# Altium PCB Sync.PcbDoc
Units mm, origin at the board's own origin, x right, y up, seen from the top; angles counter-clockwise.
Board outline 53 x 53 mm, 2 copper layers (Top Layer, Bottom Layer), stack 0.891 mm thick; 23 components, 14 nets, 60 pads, 114 vias.
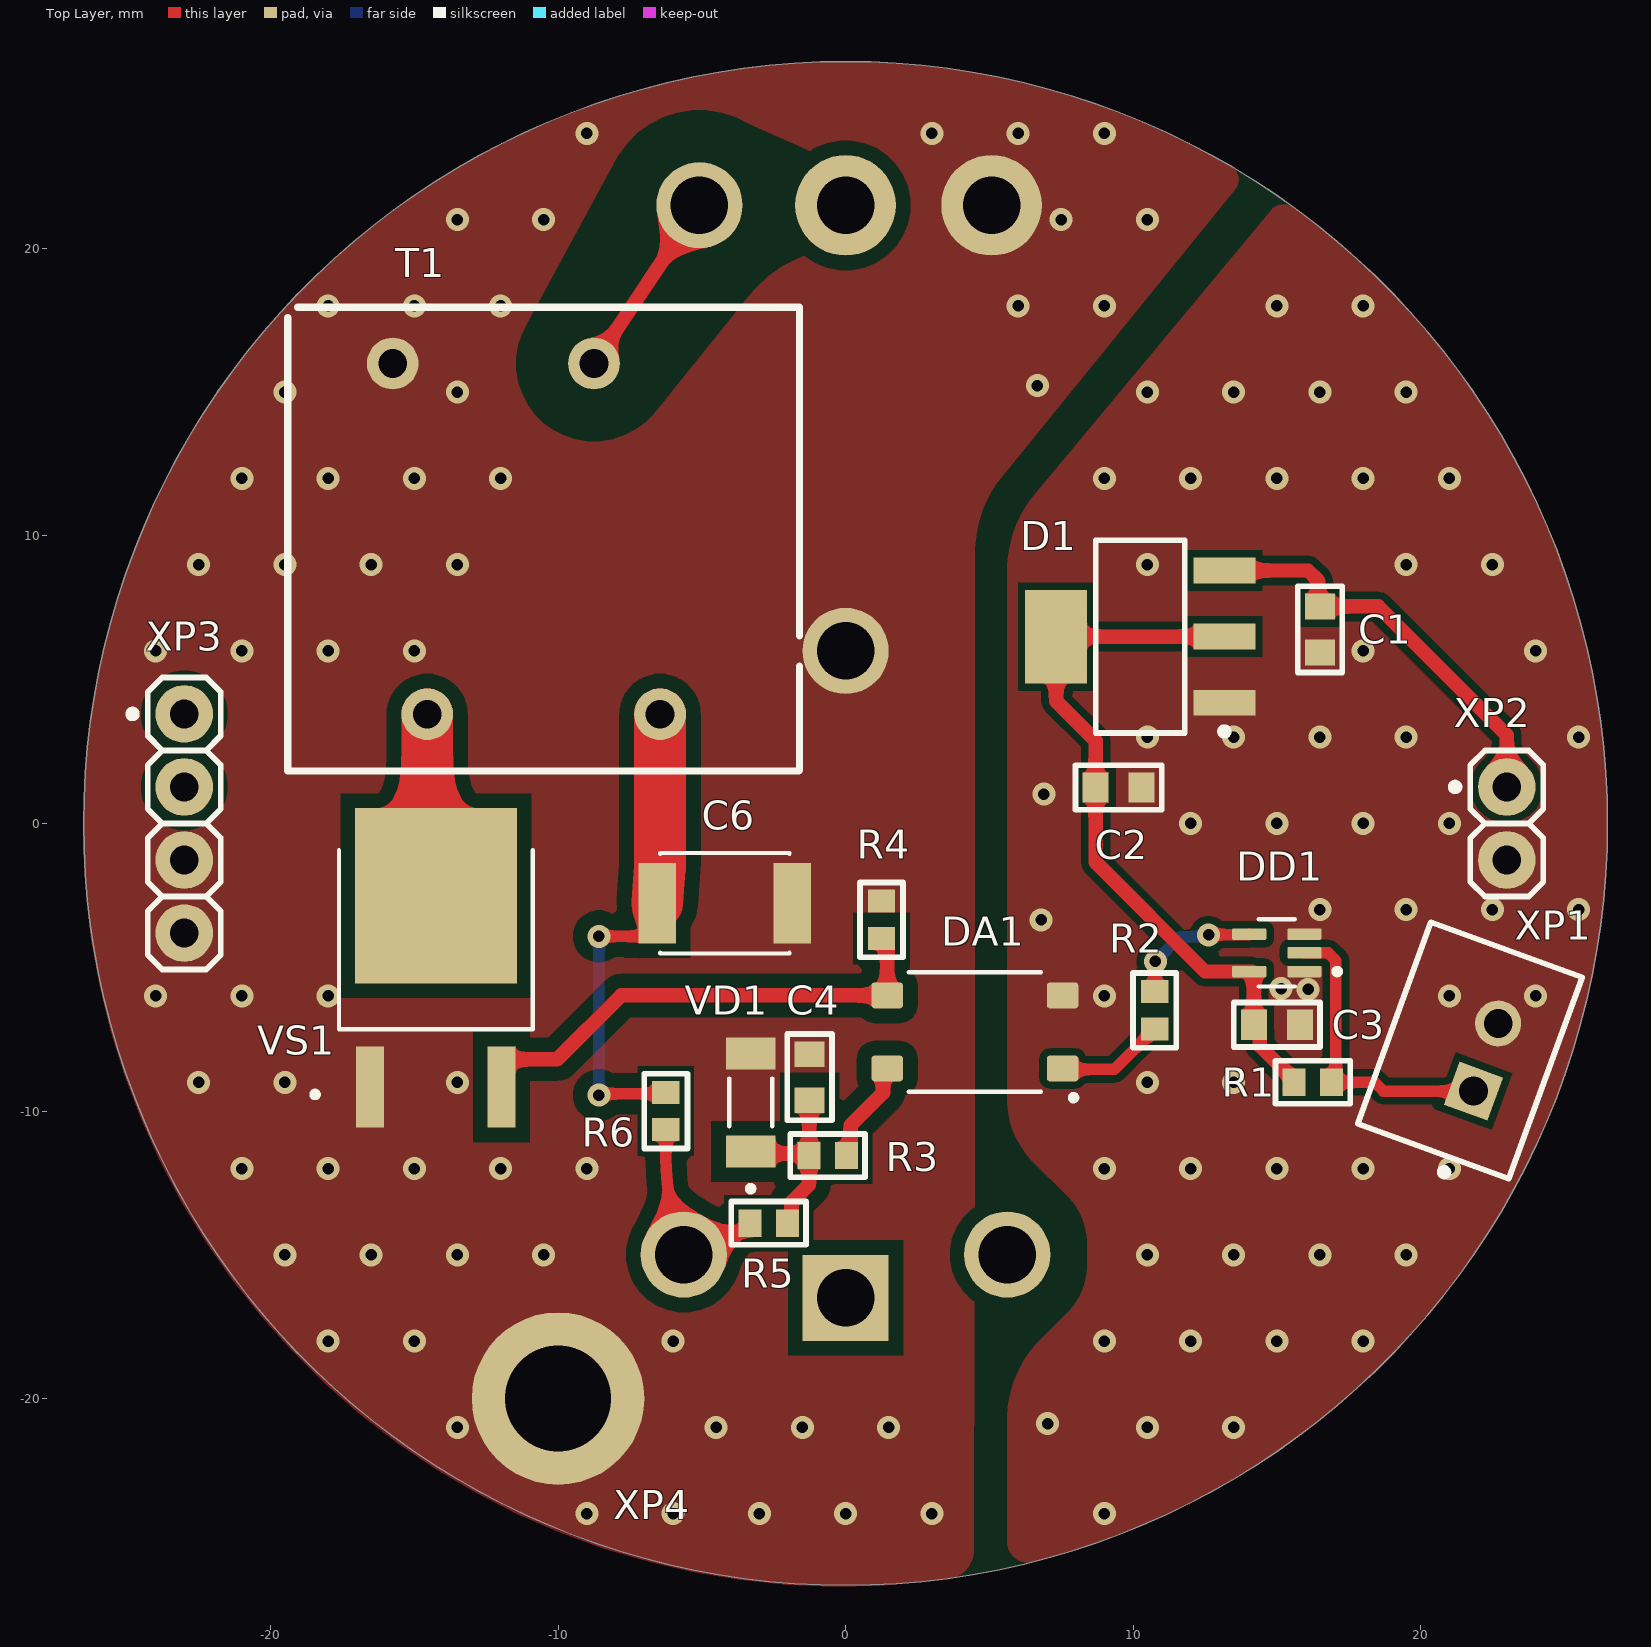
[diagram p0: Top Layer view]
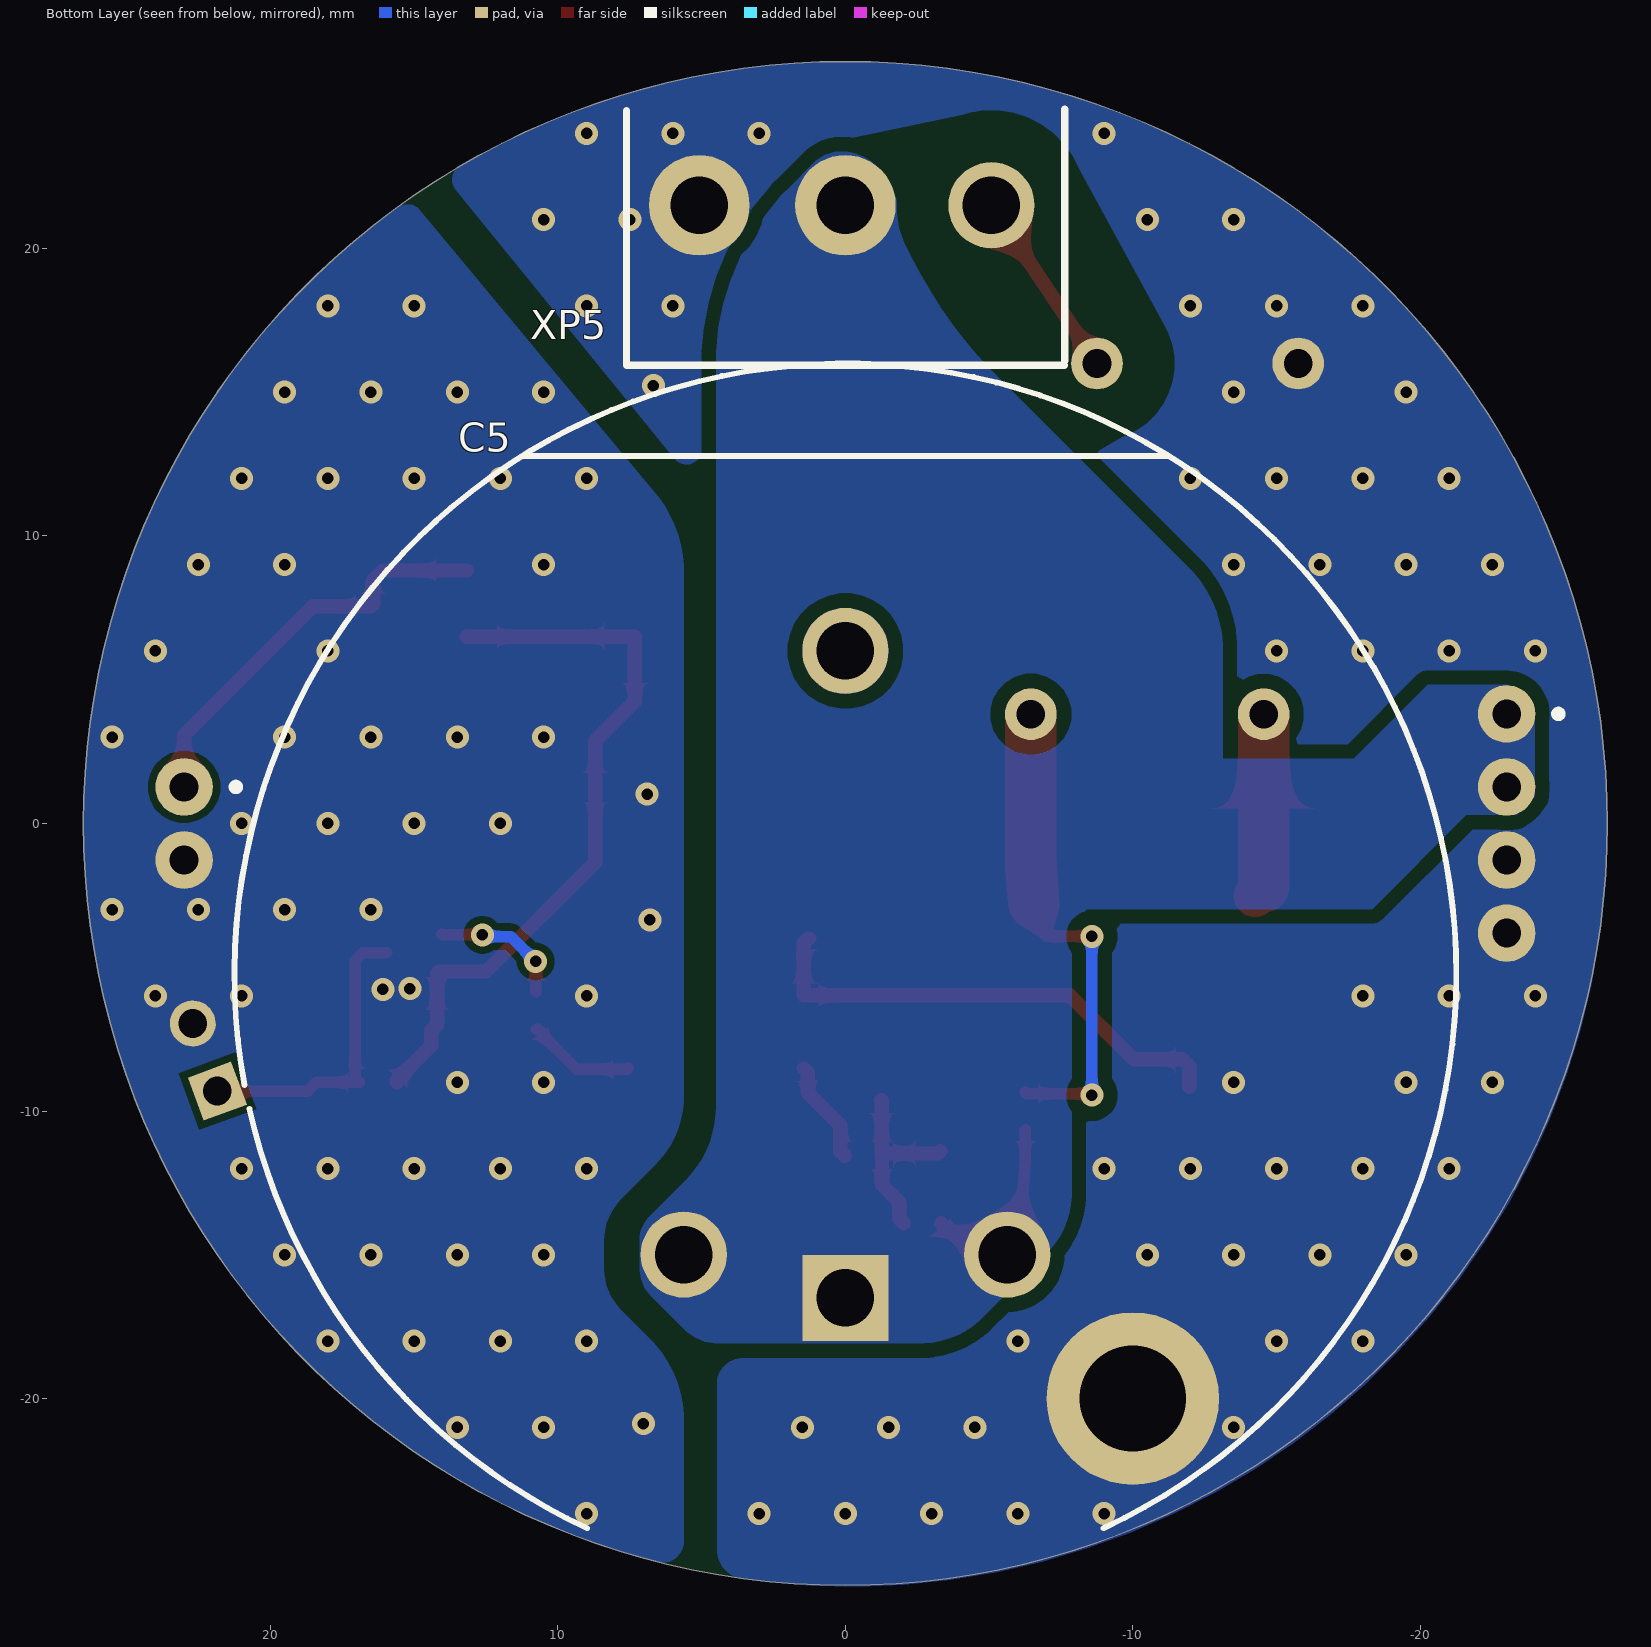
[diagram p1: Bottom Layer view, seen from below]

## Layer stack, top to bottom
Top Solder: solder mask 0.0102, Solder Resist, Dk 3.5
Top Layer: signal copper 0.0356
Dielectric 1: dielectric 0.82, FR-4, Dk 4.8
Bottom Layer: signal copper 0.0356
Bottom Solder: solder mask 0.0102, Solder Resist, Dk 3.5

## Board outline
0,-26.5 cw(c0,0) -26.5,0 cw(c0,0) 0,26.5 cw(c0,0) 26.5,0 cw(c0,0)

## Design rules (kind name [scope] priority, off if disabled: settings)
Clearance Clearance_2 [InNetClass('ebanuto_high_voltage')] p1: gap=1.8 ignorepadtopadclearanceinfootprint=FALSE
Clearance Clearance_1 [InNetClass('high_voltage')] p2: gap=0.5 ignorepadtopadclearanceinfootprint=FALSE
Clearance [All] p3: gap=0.25 ignorepadtopadclearanceinfootprint=TRUE
ComponentClearance [All] p1: gap=0 collisioncheckmode=3 verticalgap=2540 showdistances=FALSE
Height [All] p1: minheight=0 maxheight=104 prefheight=12.7
HoleSize [All] p1: absolutevalues=TRUE maxlimit=4 minlimit=0.4 maxpercent=80.000 minpercent=20.000
MinimumSolderMaskSliver [All] p1: minsoldermaskwidth=0.15
PolygonConnect [All] p1: connectstyle=Direct reliefconductorwidth=0.254 reliefentries=4 polygonreliefangle="90 Angle" airgapwidth=0.254
RoutingVias [All] p1: holewidth=0.4 width=0.8 viastyle="Through Hole" minholewidth=0.4 minwidth=0.8 maxholewidth=0.8 maxwidth=1.2
SilkToSilkClearance [All] p1: silktosilkclearance=0.05
SilkToSolderMaskClearance [IsPad] p1: minsilkscreentomaskgap=0.05 clearancetoexposedcopper=TRUE
SolderMaskExpansion SolderMaskExpansion_1 [HoleSize=0.4] p1: expansion=0.102 istentingtop=TRUE
SolderMaskExpansion [All] p2: expansion=0.102 istentingtop=FALSE
SupplyNets "Schematic Supply Nets_4" [InNet('+5')] p1: voltage=0.000
SupplyNets "Schematic Supply Nets_2" [InNet('GND')] p2: voltage=0.000
SupplyNets "Schematic Supply Nets_3" [InNet('+15')] p3: voltage=0.000
SupplyNets "Schematic Supply Nets_1" [InNet('+300')] p4: voltage=0.000
SupplyNets "Schematic Supply Nets" [InNet('GND_HV')] p5: voltage=0.000
Width [All] p1: maxlimit=1.8 minlimit=0.2 preferedwidth=0.25
24 further rules are at their usual default settings.

## Classes and differential pairs
net class high_voltage: +300 GND_HV NetC4_2 NetC6_2 NetDA1_3 NetDA1_4 NetT1_5 NetT1_8
net class ebanuto_high_voltage: NetT1_8

## Components (designator, comment, footprint, x,y, rotation, side; value= is the part's Value field where it differs from the comment)
C1 "Capacitor" 0603C 16.5,6.75 r90 top value="0,1 мк"
C2 "Capacitor" 0603C 9.5,1.25 r180 top value="0,1 мк"
C3 "Capacitor" 0603C 15,-7 r180 top value="0,1 мк"
C4 "Capacitor" 0603C -1.25,-8.825 r270 top value="1 мк"
C5 "Capacitor_polar" 42x103_radial 0,-5.25 r270 bottom value="2700 мк"
C6 "Capacitor" 1812C -4.2,-2.775 r180 top value="0,1 мк"
D1 "LD1117S50CTR" SOT223 10.25,6.5 r180 top
DA1 "LTV354T" SOP4-2_54 4.5,-7.25 r180 top
DD1 "SN74LVC1G14DCKR" SC-70-5 15,-4.5 r180 top
R1 "Resistor" 0603R 16.25,-9 r180 top value="1,0 к"
R2 "Resistor" 0603R 10.75,-6.5 r270 top value=180
R3 "Resistor" 0603R -0.625,-11.55 r180 top value="1,8 к"
R4 "Resistor" 0603R 1.25,-3.35 r270 top value=100
R5 "Resistor" 0603R -2.675,-13.9 r180 top value="39 к"
R6 "Resistor" 0603R -6.25,-10 r270 top value="510 к"
T1 "HV_trans" EE16_transformer -10.5,9.9 r180 top value=0
VD1 "BZV55-B12" mini_MELF_3.5mm -3.3,-9.7 r90 top value="12 В"
VS1 "TS820-600B-TR" DPAK -14.25,-5.025 r0 top
XP1 "CWF-2" CWF-2 22.675,-6.95 r250 top
XP2 "PLH-2" PLH2_type18 23,1.27 r0 top
XP3 "PLH-4" PLH4_type18 -23,3.81 r0 top
XP4 "SMT spacer" 9774030151 -10,-20 r0 top
XP5 "MPW-3" MPW-3 -5.08,21.5 r0 bottom

## Footprints (in the part's own frame and the unit in brackets; to place one, negate y for a bottom-side part, rotate by r counter-clockwise, add the part's x,y. Pads: shape width x height; smd on the part's side, far side on the other; paste and mask are expansions set on the pad)
42x103_radial [mm]
  round 3 hole 2 paste-2539.97 mask+0: 1(9.743,-5.625) 1(9.743,5.625) 2(-11.25,0)
  rect 3x3 hole 2 paste-2539.97 mask+0: 1(11.25,0)
  silkscreen extent -21.25,-21.25 19.26,21.25, body extent -21.25,-21.25 21.25,21.25, height 103.31
0603C [mm] "Chip Resistor, 2-Leads, Body 1,40x0,80mm, IPC Medium Density"
  rect 0.9x1.05 smd: 1(-0.8,0) 2(0.8,0)
  silkscreen extent -1.5,-0.77 1.5,0.77, body extent -0.85,-0.45 0.85,0.45, height 0.9
0603R [mm] "Chip Resistor, 2-Leads, Body 1.60x0.85mm, IPC Medium Density"
  rect 0.8x0.95 smd: 1(-0.65,0) 2(0.65,0)
  silkscreen extent -1.3,-0.75 1.3,0.75, body extent -0.87,-0.47 0.88,0.48, height 0.9
1812C [mm]
  rect 1.3x2.8 smd: 1(-2.35,0) 2(2.35,0)
  silkscreen extent -2.25,-1.75 2.25,1.75, body extent -2.25,-1.6 2.25,1.6, height 2.62
9774030151 [mm] "SMT Steel Spacer with internal Thread M2.5, height 3mm"
  round 6 / inner round 0 / far side round 6 hole 3.7: 1(0,0)
  body extent -2.55,-2.55 2.55,2.55, height 3
CWF-2 [mm]
  rect 1.6x1.6 hole 1 paste-2539.97 mask+0: 1(2.5,0.025)
  round 1.6 hole 1 paste-2539.97 mask+0: 2(0,0.025)
  silkscreen extent -2.51,-3.38 5.62,2.22, body extent -2.5,-3.52 5,2.23, height 7
DPAK [mm]
  rect 0.97x2.83 smd: 1(-2.29,-4.14) 3(2.29,-4.14)
  rect 5.63x6.09 smd: 2(0,2.51)
  silkscreen extent -4.3,-4.5 3.37,4.09, body extent -3.27,-4.96 3.27,4.96, height 2.39
EE16_transformer [mm]
  round 1.8 hole 1: 2(-4.05,6.1) 5(4.05,6.1) 8(-1.75,-6.1) 10(5.25,-6.1)
  silkscreen extent -8.9,-8.05 8.9,8.08, body extent -8.9,-8.05 8.9,8.05, height 16.6
mini_MELF_3.5mm [mm]
  rect 1.11x1.73 smd: 1(1.705,0) 2(-1.705,0)
  silkscreen extent -3.1,-0.75 0.83,0.75, body extent -1.75,-0.8 1.75,0.8, height 1.6
MPW-3 [mm]
  round 3 hole 2: 1(0,0)
  round 3.5 hole 2: 2(5.08,0) 3(10.16,0)
  silkscreen extent -2.55,-3.35 12.7,5.56, body extent -2.51,-4.85 12.73,5.6, height 14.17
PLH2_type18 [mm] "Connfly https://static.chipdip.ru/lib/530/DOC059530234.pdf"
  round 2 hole 1: 1(0,0) 2(0,-2.54)
  silkscreen extent -1.92,-3.81 1.27,1.27, body extent -1.27,-3.81 1.27,1.27, height 16.34
PLH4_type18 [mm] "Connfly https://static.chipdip.ru/lib/530/DOC059530234.pdf"
  round 2 hole 1: 1(0,0) 2(0,-2.54) 3(0,-5.08) 4(0,-7.62)
  silkscreen extent -1.92,-8.89 1.27,1.27, body extent -1.27,-8.89 1.27,1.27, height 16.34
SC-70-5 [mm]
  rrect25% 1.19x0.4 smd mask-2539.97: 1(-0.96,0.65) 2(-0.96,0) 3(-0.96,-0.65) 4(0.96,-0.65) 5(0.96,0.65)
  silkscreen extent -2.2,-1.17 0.63,1.17, body extent -0.71,-1.09 0.69,1.1, height 0.76
SOP4-2_54 [mm]
  rrect25% 1.1x0.9 smd: 1(-3.05,1.27) 2(-3.05,-1.27) 3(3.05,-1.27) 4(3.05,1.27)
  silkscreen extent -3.53,-2.07 2.3,2.39, body extent -3.5,-1.92 3.5,1.92, height 2.4
SOT223 [mm] "SOT223, ld1117"
  rect 2.15x0.9 smd: 1(-2.925,2.3) 2(-2.925,0) 3(-2.925,-2.3)
  rect 2.15x3.25 smd: 2(2.925,0)
  silkscreen extent -3.05,-3.35 1.55,3.42, body extent -3.56,-3.3 3.51,3.2, height 1.6

## Part data
C1 C2 C3: library part Capacitor_0,1u_10_50V_X7R_0603C, "Конденсатор", Capacity (nF)=100, Dielectric=X7R, Tolerance=0,1, Voltage (V)=50, Library Path2=Schematic\Capacitor.SchLib, Part Number=Capacitor_0,1u_10_50V_X7R_0603C
C4: library part Capacitor_1u_10_50V_X7R_0603C, "Конденсатор", Capacity (nF)=1000, Dielectric=X7R, Tolerance=0,1, Voltage (V)=50, Library Path2=Schematic\Capacitor.SchLib, Part Number=Capacitor_1u_10_50V_X7R_0603C
C5: library part "JCCON 2700uF 400V", "Конденсатор алюминиевый электролитический 2700мкФ 400В 20%", Capacity (uF)=2700, Tolerance=20, Voltage (V)=400, Part Number="JCCON 2700uF 400V", Type=Aluminum
C6: library part Capacitor_0,1u_10_1000V_X7R_1812C, "Конденсатор", Capacity (nF)=100, Dielectric=X7R, Tolerance=0,1, Voltage (V)=1000, Library Path2=Schematic\Capacitor.SchLib, Part Number=Capacitor_0,1u_10_1000V_X7R_1812C
D1: "Линейный стабилизатор напряжения", Part Number=LD1117S50CTR
DA1: "Оптопара с транзисторным выходом, UMW", Check_prices=https://www.snapeda.com/parts/LTV816/Lite-On/view-part/?ref=eda, Part Number=LTV354T, SnapEDA_Link=https://www.snapeda.com/parts/LTV816/Lite-On/view-part/?ref=snap
DD1: "Одноканальный инвертор с триггером Шмитта", Part Number=SN74LVC1G14DCKR
R1: library part Resistor_1.0k_1_0603, "Резистор номиналом 1,0 кОм и точностью 1%", Tolerance=1%, Part Number=Resistor_1.0k_1_0603
R2: library part Resistor_180_1_0603, "Резистор номиналом 180 Ом и точностью 1%", Tolerance=1%, Part Number=Resistor_180_1_0603
R3: library part Resistor_1.8k_1_0603, "Резистор номиналом 1,8 кОм и точностью 1%", Tolerance=1%, Part Number=Resistor_1.8k_1_0603
R4: library part Resistor_100_1_0603, "Резистор номиналом 100 Ом и точностью 1%", Tolerance=1%, Part Number=Resistor_100_1_0603
R5: library part Resistor_39k_1_0603, "Резистор номиналом 39 кОм и точностью 1%", Tolerance=1%, Part Number=Resistor_39k_1_0603
R6: library part Resistor_510k_1_0603, "Резистор номиналом 510 кОм и точностью 1%", Tolerance=1%, Part Number=Resistor_510k_1_0603
T1: "Импульсный трансформатор для поджига вспышки", Current (A)=10000, Part Number=HV_trans
VD1: "Стабилитрон 12В, 5%, 0.5Вт", Current nominal (mA)=5, Power (W)=0.5, Voltage nominal (V)=12, Accuracy=0,02, Part Number=BZV55-B12
VS1: "Тиристор 600В 8А", Part Number=TS820-600B-TR, Напряжение="600 В", Ток макс#="8 А"
XP1: "2-пиновый разъем с ключом", Value1=Синхронизация, Value2=Общий, Datasheet=https://static.chipdip.ru/lib/413/DOC001413777.pdf, Part Number=CWF-2, System=Connector
XP2: "Гребенка высокая 2 пина типоразмер 18 (промежуток 10.4мм) Connfly", Value1=+15В, Value2=Общий, Datasheet=https://static.chipdip.ru/lib/530/DOC059530234.pdf, Part Number=PLH-2, System=Connector
XP3: "Гребенка высокая 4 пина типоразмер 18 (промежуток 10.4мм) Connfly", Value1=+300В, Value3=GND_HV, Datasheet=https://static.chipdip.ru/lib/530/DOC059530234.pdf, Part Number=PLH-4, System=Connector, Value2=+300В, Value4=GND_HV
XP4: library part SMT_spacer_nut, "Стойка под пайку, М2.5, высота 3мм, SMT spacer nut - ключевые слова, Hangzhou WildChip Tech Co., Ltd. Store магазин на алике", Value1=GND_HV, Datasheet=https://aliexpress.ru/item/1005005620368789.html?sku_id=12000033777723210&srcSns=sns_More&businessType=ProductDetail&spreadType=socialShare&tt=MG&utm_medium=sharing, Part Number=SMT_spacer_nut
XP5: "MPW-3 , Вилка на плату 5.08мм прямая 3pin", Value1="Поджиг, 13кВ", Value2=+300В, Value3=GND_HV, Part Number=MPW-3, System=Connector

## Via types
v1: diameter 0.8, hole 0.4, Top Layer to Bottom Layer, tented both sides, 114 vias

## Nets (pads, with @x,y where several pads share a name; then routed paths per layer and width w, separated by ;. In a path a pad name is that pad's centre, name@x,y a point inside that pad or via, vN(x,y) a via of type N, cw(c..) or ccw(c..) an arc to the next point about the centre after c; other vN are vias at no path point)
+5: C2.2 C3.2 D1.2 DD1.5 R1.2 | length 25.7
  Top Layer w0.5: D1.2@13.175,6.5 7.325,6.5 7.325,4.25 8.7,2.875 C2.2 8.7,-1.35 12.5,-5.15 DD1.5 14.15,-5.15 14.2,-5.2 C3.2 14.4,-7.2 14.4,-7.725 15.6,-8.925 R1.2
+15: C1.2 D1.3 XP2.1 | length 14.5
  Top Layer w0.5: D1.3 16.085,8.8 16.428,8.457 16.428,7.622 C1.2 18.525,7.55 23,3.075 XP2.1
+300: C5.1 R5.2 R6.2 XP3.1 XP3.2 XP5.2 | length 7
  Top Layer w0.4: R6.2 -6.25,-10.85 -6.25,-11.613 ccw(c2.639,-11.613) -5.868,-14.19 C5.1@-5.625,-14.993
  Top Layer w0.5: C5.1@-5.625,-14.993 -5.587,-14.978 -3.475,-14.125 R5.2
GND: C1.1 C2.1 C3.1 D1.1 DA1.2 DD1.1 DD1.3 XP1.2 XP2.2
  other v1: 9,-24 10.5,-21 13.5,-21 7.025,-20.875 9,-18 12,-18 15,-18 18,-18 10.5,-15 13.5,-15 16.5,-15 19.5,-15 9,-12 12,-12 15,-12 18,-12 21,-12 10.5,-9 13.5,-9 9,-6 21,-6 24,-6 16.087,-5.772 15.148,-5.747 6.8,-3.35 16.5,-3 19.5,-3 22.5,-3 25.5,-3 12,0 15,0 18,0 21,0 6.9,1.025 10.5,3 13.5,3 16.5,3 19.5,3 25.5,3 18,6 24,6 10.5,9 19.5,9 22.5,9 9,12 12,12 15,12 18,12 21,12 10.5,15 13.5,15 16.5,15 19.5,15 15,18 18,18
GND_HV: C4.1 C5.2 C6.1 R4.1 T1.10 VD1.1 VS1.1 XP3.3 XP3.4 XP4.1 XP5.3
  other v1: -9,-24 -6,-24 -3,-24 0,-24 3,-24 -13.5,-21 -4.5,-21 -1.5,-21 1.5,-21 -18,-18 -15,-18 -6,-18 -19.5,-15 -16.5,-15 -13.5,-15 -10.5,-15 -21,-12 -18,-12 -15,-12 -12,-12 -9,-12 -22.5,-9 -19.5,-9 -13.5,-9 -24,-6 -21,-6 -18,-6 -24,6 -21,6 -18,6 -15,6 -22.5,9 -19.5,9 -16.5,9 -13.5,9 -21,12 -18,12 -15,12 -12,12 -19.5,15 -13.5,15 6.675,15.225 -18,18 -15,18 -12,18 6,18 9,18 -13.5,21 -10.5,21 7.5,21 10.5,21 -9,24 3,24 6,24 9,24
NetC4_2: C4.2 R3.2 R5.1 VD1.2 | length 6.7
  Top Layer w0.5: VD1.2 -3.228,-11.477 -1.348,-11.477 R3.2 ; R5.1 -1.875,-13.75 -1.875,-13.175 -1.275,-12.575 R3.2 ; C4.2 -1.262,-9.637 -1.262,-11.538 R3.2
NetC6_2: C6.2 R6.1 T1.2 | length 17.3
  Top Layer w0.4: v1(-8.575,-9.45) -8.525,-9.4 -6.3,-9.4 R6.1 ; v1(-8.575,-3.925) -7,-3.925 C6.2
  Top Layer w1.8: C6.2 -6.511,-2.263 -6.455,-1.539 ccw(c-8.25,-1.401) -6.45,-1.404 T1.2
  Bottom Layer w0.4: v1(-8.575,-9.45) v1(-8.575,-3.925)
NetDA1_1: DA1.1 R2.2 | length 3.8
  Top Layer w0.4: DA1.1 7.584,-8.554 9.346,-8.554 10.475,-7.425 10.475,-7.35 10.675,-7.15 R2.2
NetDA1_3: DA1.3 R4.2 VS1.3 | length 17.2
  Top Layer w0.5: VS1.3@-11.96,-9.15 -11.96,-8.435 -11.725,-8.2 -10.025,-8.2 -7.805,-5.98 DA1.3 1.45,-4.15 1.3,-4 R4.2
NetDA1_4: DA1.4 R3.1 | length 3.6
  Top Layer w0.5: R3.1 0.175,-11.4 0.175,-10.5 1.305,-9.37 1.305,-8.665 DA1.4
NetDD1_2: DD1.2 R1.1 XP1.1 | length 10.6
  Top Layer w0.4: DD1.2 16.783,-4.5 17.055,-4.772 17.055,-8.845 R1.1 17.055,-9 18.4,-9 18.708,-9.308 XP1.1
NetDD1_4: DD1.4 R2.1 | length 4.7
  Top Layer w0.4: R2.1 10.762,-5.837 10.762,-4.813 v1(10.775,-4.8) ; v1(12.625,-3.875) 12.638,-3.862 14.028,-3.862 DD1.4
  Bottom Layer w0.4: v1(10.775,-4.8) 11.643,-3.932 12.568,-3.932 v1(12.625,-3.875)
NetT1_5: T1.5 VS1.2 | length 6.4
  Top Layer w1.5: VS1.2@-14.55,-2.2 VS1.2@-14.25,-2.5
  Top Layer w1.8: VS1.2@-14.55,-2.2 T1.5
NetT1_8: T1.8 XP5.1 | length 6.6
  Top Layer w0.5: T1.8 XP5.1

## Polygon pours and split planes (outlines as drawn)
GND_HV on Bottom Layer "GND_HV_L02_P007" (solid, pour order 7): 13.547,22.046 4.455,10.857 4.455,-25.277 cw(c3.461,-25.277) 3.598,-26.262 cw(c-0.137,-0.165) -26.5,0 cw(c0,0) 13.391,22.867 cw(c13.122,22.391)
GND on Bottom Layer "GND_L02_P006" (solid, pour order 6): 26.5,0 cw(c0.001,-0.001) 6.551,-25.677 cw(c6.361,-24.966) 5.625,-24.966 5.625,-20.763 cw(c9.635,-20.763) 6.8,-17.927 7.802,-16.925 ccw(c6.36,-15.482) 8.4,-15.482 8.4,-14.522 ccw(c6.294,-14.522) 7.783,-13.033 6.599,-11.849 cw(c8.951,-9.497) 5.625,-9.497 5.625,8.775 cw(c9.872,8.763) 6.617,11.49 14.807,21.323 cw(c15.256,20.949) 15.593,21.427 cw(c0.001,0.001)
+300 on Bottom Layer "+300_L02_P000" (solid, pour order 0): -7.875,-12.824 -7.875,-3.5 -13.125,1.75 -13.125,6.045 cw(c-9.118,6.045) -11.951,8.878 -5.295,15.534 ccw(c-16.566,26.806) -2.13,20.046 ccw(c-5.219,21.473) -1.818,21.385 cw(c-0.982,21.189) -1.8,21.45 cw(c0.346,21.258) -0.162,23.352 cw(c0.093,21.907) 1.131,22.945 1.922,22.154 cw(c-4.302,15.93) 4.5,15.93 4.5,-9.883 ccw(c8.041,-9.883) 5.537,-12.386 6.788,-13.637 cw(c5.888,-14.537) 7.161,-14.537 7.161,-15.416 cw(c5.667,-15.416) 6.723,-16.472 5.615,-17.581 cw(c4.398,-16.363) 4.398,-18.085 -2.594,-18.085 cw(c-2.594,-15.018) -4.762,-17.187 -6.991,-14.958 cw(c-4.857,-12.824)
+300 on Bottom Layer "+300_L02_P002" (solid, pour order 2): -23.975,4.05 -23.975,0.925 -23.35,0.3 -21.6,0.3 -18.325,-2.975 -5.075,-2.975 -5.075,1.675 -5.65,2.25 -17.675,2.25 -20.25,4.825 -23.05,4.825
GND on Top Layer "GND_L01_P008" (solid, pour order 8): 26.5,0 cw(c0.001,-0.001) 6.542,-25.68 cw(c6.361,-24.967) 5.625,-24.967 5.625,-20.757 cw(c9.621,-20.757) 6.795,-17.932 7.78,-16.947 ccw(c6.285,-15.451) 8.4,-15.451 8.4,-14.537 ccw(c6.259,-14.537) 7.773,-13.023 6.552,-11.802 cw(c8.791,-9.564) 5.625,-9.564 5.625,8.775 cw(c9.872,8.763) 6.617,11.49 14.807,21.324 cw(c15.256,20.95) 15.594,21.426 cw(c0.001,0)
GND_HV on Top Layer "GND_HV_L01_P003" (solid, pour order 3): 13.544,22.043 5.39,12.007 ccw(c8.686,9.425) 4.5,9.35 4.5,-8.4 4.457,-25.281 cw(c3.465,-25.279) 3.606,-26.261 cw(c-0.137,-0.165) -26.5,0 cw(c-0.001,0) 13.396,22.864 cw(c13.117,22.389)

## Other copper
Top Layer:
  pour cut-out: -7.902,23.23 -11.059,17.415 -9.3,14.55 -6.691,14.241 -3.316,18.418 cw(c-0.006,15.744) -1.434,19.752 -1,23.275 -4.088,24.647
Bottom Layer:
  pour cut-out: 2.9,-18.6 3.575,-18.6 cw(c3.575,-19.5) 4.475,-19.5 4.475,-20.275 4.625,-20.275 5.275,-19.625 5.275,-18.3 3.15,-18.3 3.125,-18.325
  pour cut-out: 4.825,13.175 5,13 ccw(c5.518,13) 5.884,12.634 6.275,13.025 6.4,12.9 6.4,11.875 5.475,10.95 4.75,10.95
  pour cut-out: -11.059,17.415 -8.138,22.767 -4.82,24.8 0.222,23.75 -1.434,23.248 -4.825,16.175 -8.325,12.7 -10.509,13.941

## Silkscreen, mask and mechanical layers (free items; w line width, h text height)
Mechanical 4:
  circle w0.254: c0,0 r26.5